# EAGLE board TTGO_shield_revB (EAGLE 9.0.1)
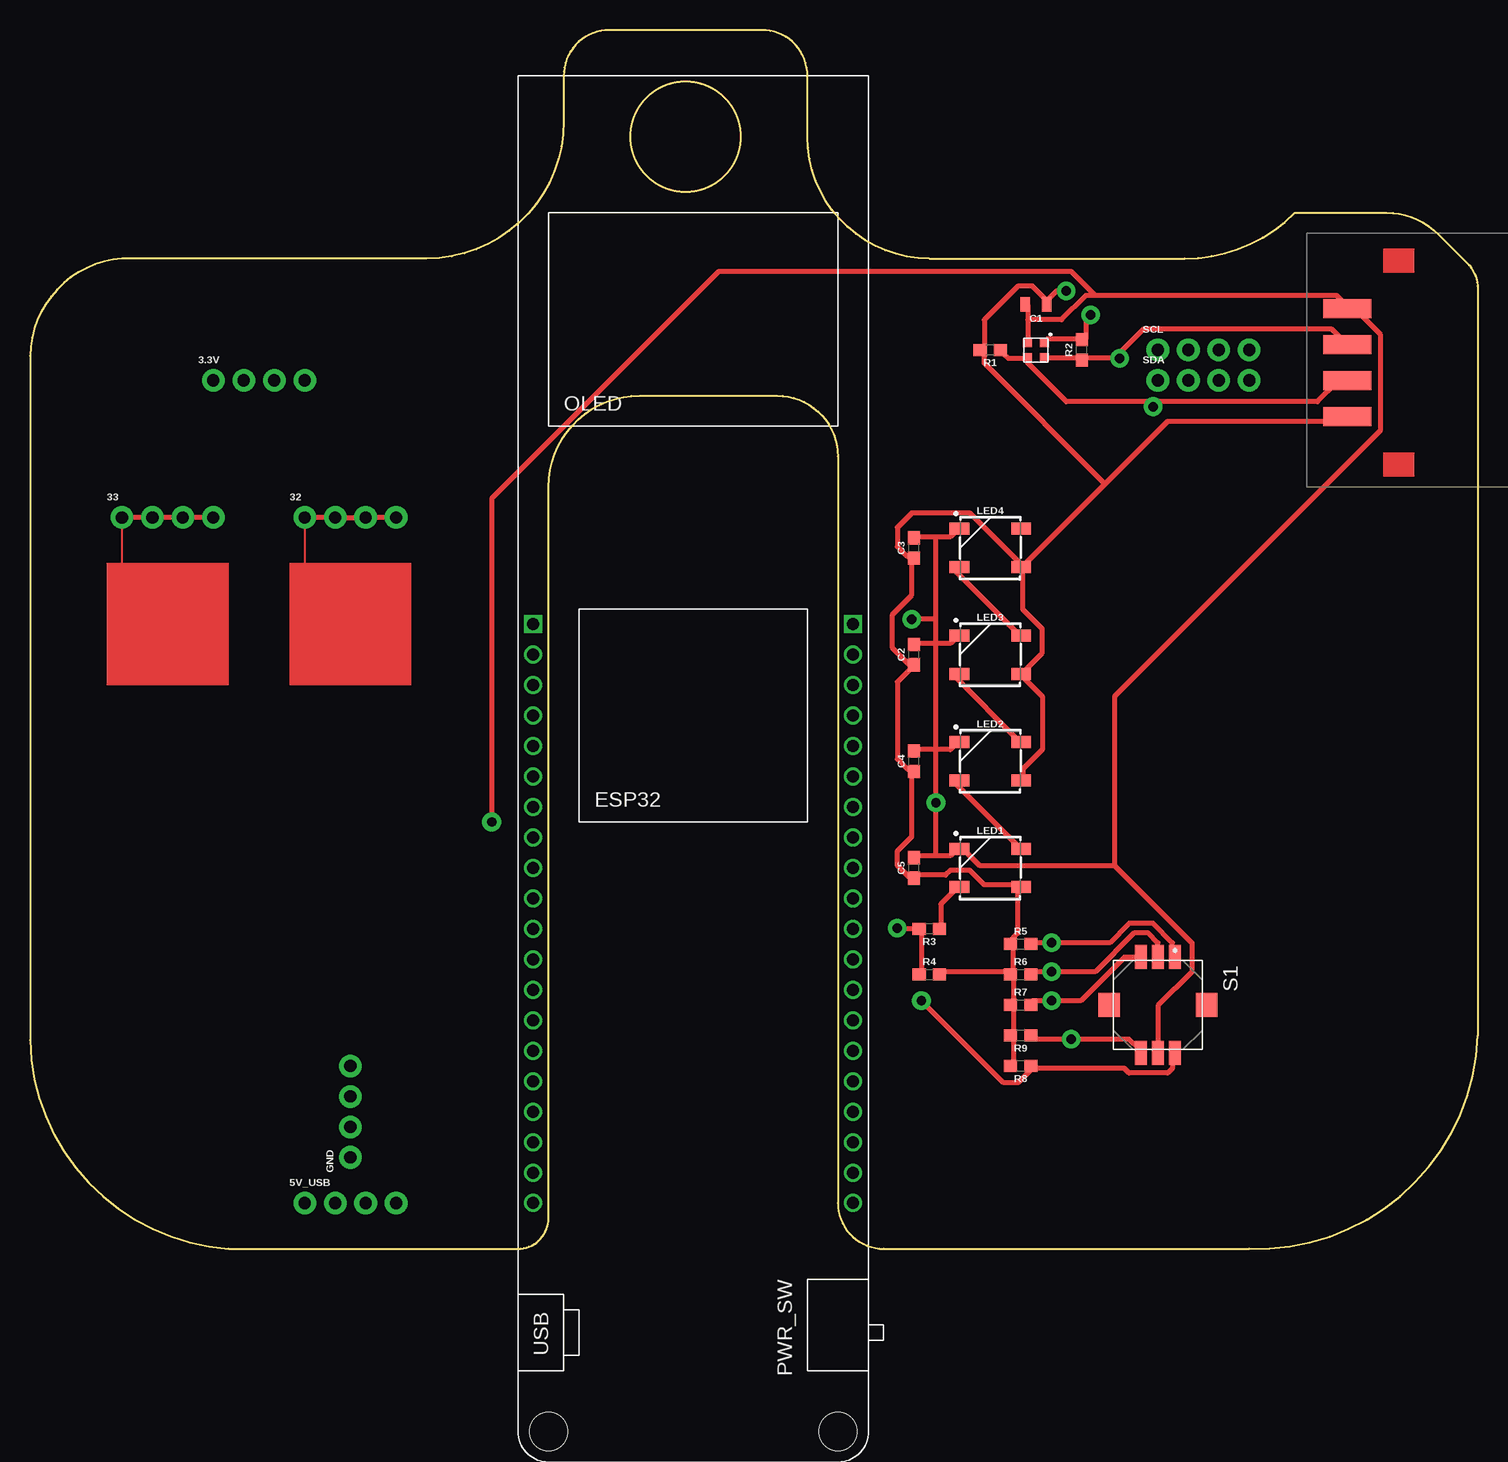
[diagram p0: board, top side]
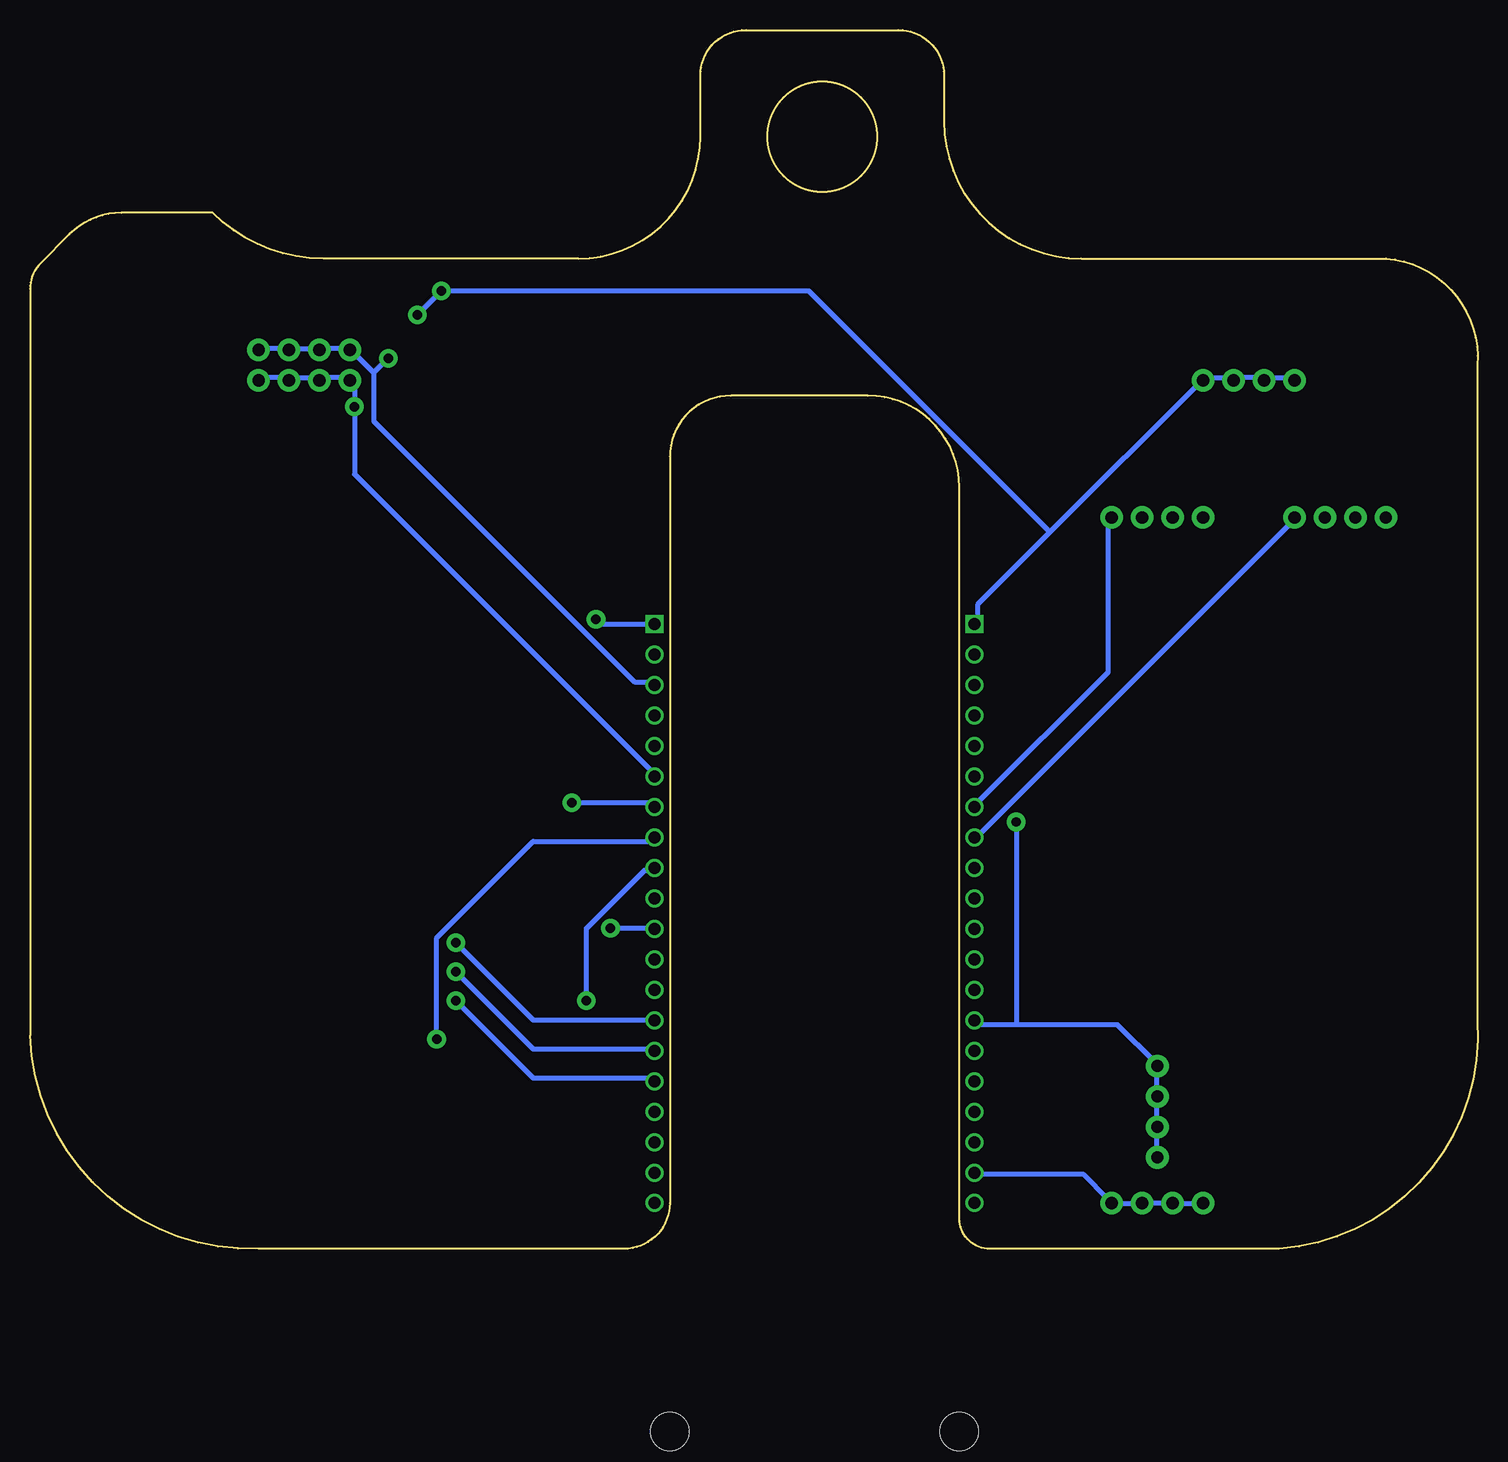
[diagram p1: board, bottom side, seen from below]

Size 120.69 x 101.6 mm. Coordinates in mm from the lower left corner, seen from the top.
Outline: 43.22,2.54 43.22,63.5 arc-90 50.84,71.12 62.27,71.12 arc-90 67.35,66.04 67.35,3.81 arc90 71.16,0 101.64,0 arc90 120.69,17.78 120.69,80.01 arc45 119.79,82.18 117.41,84.56 arc45 113.07,86.36 105.45,86.36 arc-45 96.25,82.55 74.97,82.55 arc-90 64.81,92.71 64.81,97.79 arc90 61,101.6 48.3,101.6 arc90 44.49,97.79 44.49,93.98 arc-90 33.06,82.55 7.66,82.55 arc90 0.04,73.66 0.04,19.05 arc90 16.55,0 40.68,0 arc90 43.22,2.54
Outline: circle at 54.65,92.71 radius 4.58
Copper layers (1*16): Top 0.035mm / dielectric 1.5mm / Bottom 0.035mm
Design rules "OthermillDRC_1_64_v2": minimum track width 16mil, minimum drill 31mil, track to track 0.39878125mm, track to pad 0.39878125mm, pad to pad 0.39878125mm, via to via 0.39878125mm, smd to smd 0mil, copper to edge 0mil, drill to drill 1mil, minimum pad ring 0mil, minimum via ring 15mil, stop-mask expansion 1mil, vias tented up to drill 30mil, thermal gap 10mil
tRestrict: area 39.4,1.3 to 44.5,54.6; area 66.1,1.3 to 71.2,54.6; area 14,71.1 to 24.2,73.7; area 25.4,6.4 to 28,16.5; area 21.6,2.5 to 31.8,5.1; area 92.8,71.1 to 102.9,76.2
vRestrict: area 77.5,55.9 to 82.6,61; area 82.6,73.7 to 85.1,76.2; area 77.5,47 to 82.6,52.1; area 77.5,38.1 to 82.6,43.2; area 77.5,29.2 to 82.6,34.3; area 90.2,16.5 to 97.8,24.1; area 106.7,63.5 to 120.7,85.1

## Footprints (pad centres in the part's own frame; a part is rotated, then mirrored left to right if it is on the bottom)
1X04_NO_SILK = drill 1.016 pad 1.88: 1 0,0; 2 2.54,0; 3 5.08,0; 4 7.62,0
0805 = smd 0.8 x 1.2: 1 -0.9,0; 2 0.9,0
0603 = smd 1.1 x 1: 1 -0.85,0; 2 0.85,0
10120045-400LF = smd 1.6 x 4: A 0.8,2; B 3.8,2; C 6.8,2; D 9.8,2
WS2812B = smd 1.651 x 1: 1 2.577,-1.6; 2 2.577,1.6; 3 -2.577,1.6; 4 -2.577,-1.6
CHIPLED-4 = smd 0.7 x 0.75: 1 -0.6,0.7; 2 -0.6,-0.7; 3 0.6,-0.7; 4 0.6,0.7
TTGO-ESP32-OLED-18650 = drill 1: 0 26.67,16.51; 2 26.67,13.97; 4 26.67,19.05; 5 26.67,26.67; 5V 0,3.81; 12 0,19.05; 13 0,13.97; 14 0,21.59; 15 26.67,11.43; 16 26.67,21.59; 17 26.67,24.13; 18 26.67,29.21; 19 26.67,31.75; 21 26.67,36.83; 22 26.67,44.45; 23 26.67,46.99; 25 0,29.21; 26 0,26.67; 27 0,24.13; 32 0,34.29; 33 0,31.75; 34 0,39.37; 35 0,36.83; CLK 26.67,3.81; CMD 0,6.35; EN 0,46.99; GND 0,16.51; GND@GND_2 26.67,34.29; NC 0,1.27; NC@NC_2 26.67,1.27; RX 26.67,39.37; SD0 26.67,6.35; SD1 26.67,8.89; SD2 0,11.43; SD3 0,8.89; SVN 0,41.91; SVP 0,44.45; TX 26.67,41.91 | drill 1 square: 3.3V 0,49.53; GND@GND_3 26.67,49.53 | hole 3.175: 1.27,-17.78; 25.4,-17.78
JS1400BFQ = smd 2 x 1: 1 -4,1.43; 2 -4,0; 3 -4,-1.43; 4 4,1.43; 5 4,0; 6 4,-1.43 | smd 2 x 1.8: P$1 0,4.05; P$2 0,-4.05

## Placement (x,y rotation side)
3.3V  [1X04_NO_SILK]  15.28,72.39 0 top
5V_USB  [1X04_NO_SILK]  22.9,3.81 0 top
32  [1X04_NO_SILK]  22.9,60.96 0 top
33  [1X04_NO_SILK]  7.66,60.96 0 top
C1  1.0uF  [0805]  83.86,78.74 180 top
C2  0.1uF  [0603]  73.7,49.53 90 top
C3  0.1uF  [0603]  73.7,58.42 90 top
C4  0.1uF  [0603]  73.7,40.64 90 top
C5  0.1uF  [0603]  73.7,31.75 90 top
GND  [1X04_NO_SILK]  26.71,7.62 90 top
HEMA1  10120045-400LF  [10120045-400LF]  111.8,68.58 90 top
LED1  WS2812B  [WS2812B]  80.05,31.75 0 top
LED2  WS2812B  [WS2812B]  80.05,40.64 0 top
LED3  WS2812B  [WS2812B]  80.05,49.53 0 top
LED4  WS2812B  [WS2812B]  80.05,58.42 0 top
LTSNS1  LTR-329ALS-01  [CHIPLED-4]  83.86,74.93 270 top
MAIN  TTGO-ESP32-OLED-18650  [TTGO-ESP32-OLED-18650]  41.95,2.54 0 top
R1  4.7k  [0603]  80.05,74.93 180 top
R2  4.7k  [0603]  87.67,74.93 90 top
R3  470  [0603]  74.97,26.67 180 top
R4  10k  [0603]  74.97,22.86 0 top
R5  10k  [0603]  82.59,25.4 0 top
R6  10k  [0603]  82.59,22.86 0 top
R7  10k  [0603]  82.59,20.32 0 top
R8  10k  [0603]  82.59,15.24 180 top
R9  10k  [0603]  82.59,17.78 180 top
S1  JS1400BFQ  [JS1400BFQ]  94.02,20.32 270 top
SCL  [1X04_NO_SILK]  94.02,74.93 0 top
SDA  [1X04_NO_SILK]  94.02,72.39 0 top

## Library data of the parts
3.3V 5V_USB 32 33 GND SCL SDA = SparkFun-Connectors; PROD_ID: CONN-09696
C1 = SparkFun-Capacitors; PROD_ID: CAP-08064
C2-C5 = SparkFun-Capacitors; PROD_ID: CAP-08604
HEMA1 MAIN S1 = BadgeParts
LED1-LED4 = SparkFun-LED; PROD_ID: DIO-12503
LTSNS1 = NickParts
R1 R2 = SparkFun-Resistors; PROD_ID: RES-07857
R3 = SparkFun-Resistors; PROD_ID: RES-07869
R4-R9 = SparkFun-Resistors; PROD_ID: RES-00824

## Nets
5V: 5V_USB.1 5V_USB.2 5V_USB.3 5V_USB.4 MAIN.5V
32: 32.1 32.2 32.3 32.4 MAIN.32
33: 33.1 33.2 33.3 33.4 MAIN.33
B1: MAIN.0 R5.2 S1.1
B2: MAIN.2 R6.2 S1.2
B3: MAIN.15 R7.2 S1.3
B4: MAIN.18 R8.1 S1.4
B5: MAIN.19 R9.1 S1.6
GND: C1.2 C2.2 C3.2 C4.2 C5.2 GND.1 GND.2 GND.3 GND.4 HEMA1.D LED1.3 LED2.3 LED3.3 LED4.3 LTSNS1.2 MAIN.GND MAIN.GND@GND_2 MAIN.GND@GND_3 S1.5
N$9: LED1.2 LED2.4
N$10: LED2.2 LED3.4
N$11: LED3.2 LED4.4
N$12: LED1.4 R3.1
RGBLEDS: MAIN.17 R3.2 R4.1
SCL: HEMA1.C LTSNS1.4 MAIN.22 R2.1 SCL.1 SCL.2 SCL.3 SCL.4
SDA: HEMA1.B LTSNS1.3 MAIN.21 R1.1 SDA.1 SDA.2 SDA.3 SDA.4
VDD: 3.3V.1 3.3V.2 3.3V.3 3.3V.4 C1.1 C2.1 C3.1 C4.1 C5.1 HEMA1.A LED1.1 LED2.1 LED3.1 LED4.1 LTSNS1.1 MAIN.3.3V R1.2 R2.2 R4.2 R5.1 R6.1 R7.1 R8.2 R9.2

## Tracks (layer width: path | path; a pad name or v marks a point on that pad's centre or on a via)
5V
  Bottom 0.406: 5V_USB.1 23.18,3.77 25.2,3.77 5V_USB.2 25.6,3.77 27.61,3.77 5V_USB.3 28.01,3.77 30.43,3.77 5V_USB.4 30.83,4.18 32.85,6.19 41.7,6.19 MAIN.5V
32
  Top 0.406: 32.1 23.18,60.94 25.2,60.94 32.2 25.6,60.94 27.61,60.94 32.3 28.01,60.94 30.43,60.94 32.4
  Bottom 0.406: MAIN.32 41.7,37.19 30.83,48.06 30.83,60.94 32.4
33
  Top 0.406: 33.1 7.88,60.94 9.9,60.94 33.2 10.3,60.94 12.72,60.94 33.3 13.12,60.94 15.13,60.94 33.4
  Bottom 0.406: MAIN.33 41.7,34.37 15.13,60.94 33.4
B1  (via drill 0.79)
  Top 0.406: R5.2 83.57,25.51 v85.18,25.51 90.01,25.51 91.62,27.12 93.64,27.12 95.25,25.51 95.25,24.71 S1.1
  Bottom 0.406: v85.18,25.51 78.74,19.07 68.68,19.07 MAIN.0
B2  (via drill 0.79)
  Top 0.406: R6.2 83.57,23.1 v85.18,23.1 88.81,23.1 92.03,26.32 93.23,26.32 94.04,25.51 94.04,24.71 S1.2
  Bottom 0.406: v85.18,23.1 78.74,16.66 68.68,16.66 MAIN.2
B3  (via drill 0.79)
  Top 0.406: R7.2 83.57,20.68 v85.18,20.68 87.6,20.68 91.22,24.31 92.43,24.31 S1.3
  Bottom 0.406: v85.18,20.68 78.74,14.24 68.68,14.24 MAIN.15
B4  (via drill 0.79)
  Top 0.406: 83.57,15.05 91.22,15.05 91.62,14.64 94.84,14.64 95.25,15.05 95.25,16.25 S1.4 | v74.31,20.68 81.16,13.84 82.36,13.84 83.57,15.05 | 83.57,15.05 R8.1
  Bottom 0.406: v74.31,20.68 74.31,26.72 69.48,31.55 68.68,31.55 MAIN.18
B5  (via drill 0.79)
  Top 0.406: R9.1 83.57,17.46 v86.79,17.46 91.62,17.46 92.43,16.66 S1.6
  Bottom 0.406: v86.79,17.46 86.79,25.92 78.74,33.97 68.68,33.97 MAIN.19
GND  (via drill 0.79)
  Top 0.406: 75.52,59.33 76.73,59.33 77.13,59.73 LED4.3 | 75.52,59.33 73.91,59.33 C3.2 | 75.52,50.47 76.73,50.47 77.13,50.88 LED3.3 | 75.52,50.47 73.91,50.47 C2.2 | 75.52,41.62 76.73,41.62 77.13,42.02 LED2.3 | 75.52,41.62 73.91,41.62 C4.2 | 75.52,32.76 76.73,32.76 77.13,33.16 LED1.3 77.53,33.56 79.14,31.96 90.42,31.96 | 75.52,32.76 73.91,32.76 C5.2 | 90.42,31.96 96.86,25.51 96.86,23.1 94.04,20.28 94.04,16.66 S1.5 | 75.52,32.76 v75.52,37.19 75.52,41.62 | 75.52,41.62 75.52,50.47 | 75.52,50.47 75.52,52.49 | 75.52,52.49 75.52,59.33 | 75.52,52.49 v73.51,52.49 | 83.17,77.45 83.17,78.66 C1.2 | 83.17,77.45 83.17,75.84 LTSNS1.2 | 83.17,77.45 85.99,77.45 88,79.46 88.81,79.46 | 88.81,79.46 108.94,79.46 109.74,78.66 HEMA1.D 110.14,78.66 112.56,76.24 112.56,68.19 90.42,46.05 90.42,31.96 | v38.48,35.58 38.48,62.55 57.4,81.47 86.79,81.47 88.81,79.46
  Bottom 0.406: v75.52,37.19 68.68,37.19 MAIN.GND@GND_2 | v73.51,52.49 73.1,52.08 68.68,52.08 MAIN.GND@GND_3 | GND.1 26.81,7.8 26.81,9.81 GND.2 26.81,10.21 26.81,12.63 GND.3 26.81,13.03 26.81,15.05 GND.4 26.81,15.45 30.03,18.67 38.48,18.67 | 38.48,18.67 41.7,18.67 MAIN.GND | v38.48,35.58 38.48,18.67
N$1
  Top 0.152: 7.66,60.2 7.66,56.64
N$2
  Top 0.152: 22.9,60.2 22.9,56.39
N$9
  Top 0.406: LED1.2 82.36,33.56 77.13,38.8 LED2.4
N$10
  Top 0.406: LED2.2 82.36,42.42 77.13,47.66 LED3.4
N$11
  Top 0.406: LED3.2 82.36,51.28 77.13,56.51 LED4.4
N$12
  Top 0.406: R3.1 75.92,26.72 75.92,28.73 77.13,29.94 LED1.4
RGBLEDS  (via drill 0.79)
  Top 0.406: R4.1 74.31,23.1 74.31,26.32 R3.2 73.91,26.72 v72.3,26.72
  Bottom 0.406: v72.3,26.72 68.68,26.72 MAIN.17
SCL  (via drill 0.79)
  Top 0.406: LTSNS1.4 84.78,74.23 87.6,74.23 R2.1 88,74.23 90.42,74.23 | 90.42,74.23 92.83,76.64 108.53,76.64 109.74,75.43 HEMA1.C | v90.82,74.23 90.42,74.23
  Bottom 0.406: SCL.4 101.29,75.03 99.27,75.03 SCL.3 98.87,75.03 96.86,75.03 SCL.2 96.45,75.03 94.04,75.03 SCL.1 93.64,74.63 92.03,73.02 | 92.03,73.02 92.03,68.99 70.29,47.25 68.68,47.25 MAIN.22 | 92.03,73.02 v90.82,74.23
SDA  (via drill 0.79)
  Top 0.406: 83.17,74.23 81.56,74.23 81.16,74.63 R1.1 | 83.17,74.23 83.17,73.82 86.39,70.6 93.64,70.6 | 93.64,70.6 107.32,70.6 108.94,72.21 109.74,72.21 HEMA1.B | 83.17,74.23 LTSNS1.3 | v93.64,70.2 93.64,70.6
  Bottom 0.406: SDA.4 101.29,72.62 99.27,72.62 SDA.3 98.87,72.62 96.86,72.62 SDA.2 96.45,72.62 94.04,72.62 SDA.1 93.64,72.21 v93.64,70.2 93.64,64.56 68.68,39.6 MAIN.21
VDD  (via drill 0.79)
  Top 0.406: 73.51,48.46 72.3,47.25 72.3,40.81 73.1,40.01 73.51,40.01 C4.1 73.51,39.6 73.51,34.37 72.3,33.16 72.3,31.96 73.51,30.75 C5.1 73.91,31.15 76.33,31.15 76.73,31.55 78.34,31.55 79.55,30.34 82.36,30.34 LED1.1 82.36,29.94 82.36,26.32 81.56,25.51 R5.1 81.96,25.11 81.96,23.1 R6.1 | 73.51,48.46 71.9,50.07 71.9,52.89 73.51,54.5 73.51,57.32 C3.1 73.51,57.72 73.1,57.72 72.3,58.53 72.3,60.14 73.51,61.34 78.34,61.34 82.77,56.91 | 73.51,48.46 C2.1 | R8.2 81.96,15.45 81.96,17.46 R9.2 81.96,17.86 81.96,20.28 R7.1 81.96,20.68 81.96,22.69 R6.1 | R4.2 75.92,23.1 81.56,23.1 R6.1 | LTSNS1.1 84.78,75.84 87.6,75.84 R2.2 88,75.84 88,77.45 v88.4,77.85 | 84.78,79.06 83.57,80.27 82.36,80.27 79.55,77.45 79.55,75.03 R1.2 79.55,74.63 79.55,73.82 89.61,63.76 | v86.39,79.86 85.58,79.86 84.78,79.06 | 84.78,79.06 C1.1 | LED2.1 82.77,39.2 82.77,40.01 84.38,41.62 84.38,46.05 82.77,47.66 LED3.1 82.77,48.06 84.38,49.67 84.38,51.68 82.77,53.29 82.77,56.51 LED4.1 82.77,56.91 | 82.77,56.91 89.61,63.76 | 89.61,63.76 94.84,68.99 109.74,68.99 HEMA1.A
  Bottom 0.406: 3.3V.1 15.53,72.62 17.55,72.62 3.3V.2 17.95,72.62 19.96,72.62 3.3V.3 20.37,72.62 22.78,72.62 3.3V.4 23.18,72.21 35.66,59.73 | 35.66,59.73 41.7,53.69 41.7,52.08 MAIN.3.3V | v88.4,77.85 v86.39,79.86 55.79,79.86 35.66,59.73
(copper drawn outside any net)
  shapes: Top area x2